# EAGLE board squall-blees-board (EAGLE 7.2.0)
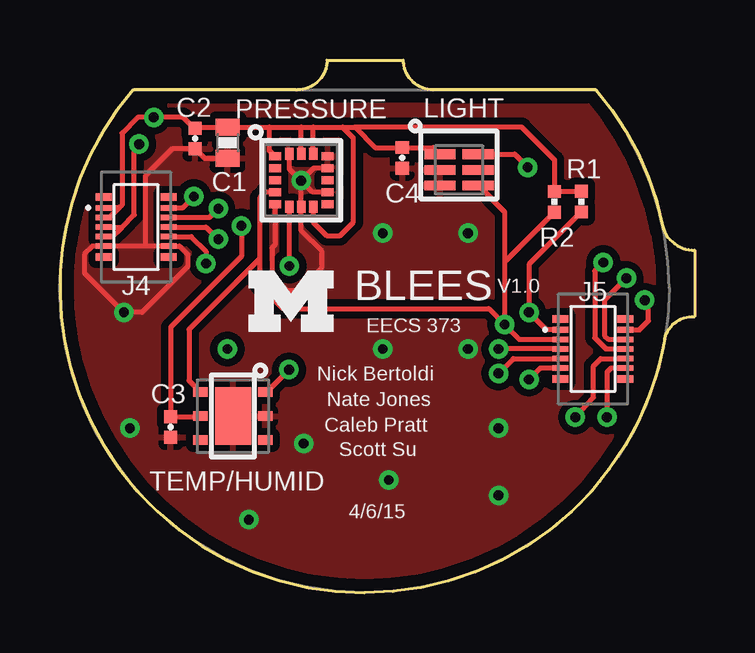
[diagram p0: board, top side]
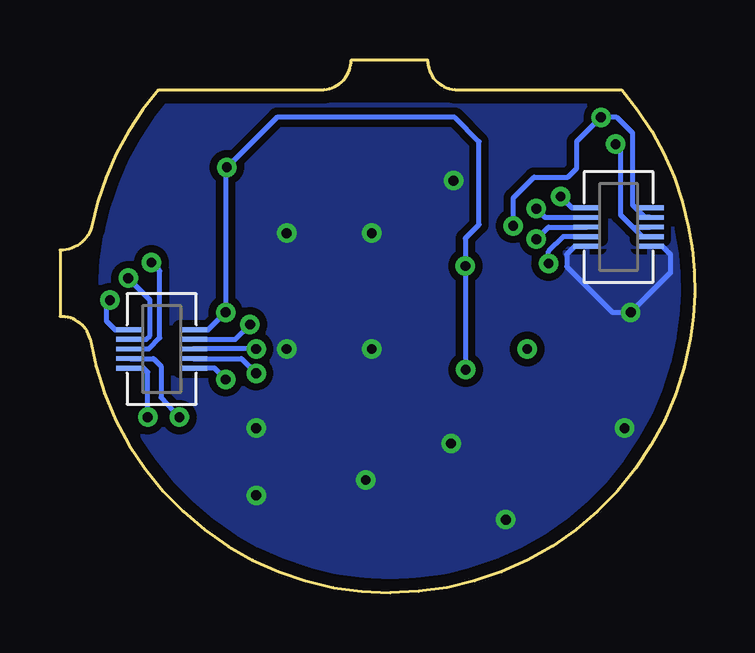
[diagram p1: board, bottom side, seen from below]

Size 26.46 x 22.2 mm. Coordinates in mm from the lower left corner, seen from the top.
Outline: 9.89,20.95 arc90 11.13,22.2 14.32,22.2 arc90 15.57,20.95 22.35,20.95 arc-30 25.14,15.25 arc75 26.46,14.28 26.46,11.51 arc80 25.21,10.58 arc-80 12.7,0 arc-80 0.18,10.58 arc-21 0.26,15.25 arc-30 3.04,20.95
Outline: 9.85,20.95 3.07,20.95
Copper layers (1*16): Top 0.0178mm / dielectric 59mil / Bottom 0.0178mm
Design rules "sunstone-2lyr_v1.0.0.3 *": minimum track width 6mil, minimum drill 14mil, track to track 5mil, track to pad 5mil, pad to pad 5mil, via to via 5mil, smd to smd 5mil, copper to edge 20mil, drill to drill 16mil, minimum pad ring 8mil, minimum via ring 8mil, stop-mask expansion 3mil, vias tented up to drill 0mil, thermal gap 10mil
tRestrict: 3 lines
bRestrict: 2 lines

## Footprints (pad centres in the part's own frame; a part is rotated, then mirrored left to right if it is on the bottom)
0603_CAP = smd 0.7 x 1: 1 -0.65,0; 2 0.65,0
0402_CAP = smd 0.536 x 0.546: 1 -0.433,0; 2 0.433,0
SQUALL_HEADER = smd 1.14 x 0.2 bottom: A1 -10.845,3.34; A2 -8.205,3.34; A3 -10.845,2.94; A4 -8.205,2.94; A5 -10.845,2.54; A6 -8.205,2.54; A7 -10.845,2.14; A8 -8.205,2.14; A9 -10.845,1.74; A10 -8.205,1.74; B1 8.205,-1.74; B2 10.845,-1.74; B3 8.205,-2.14; B4 10.845,-2.14; B5 8.205,-2.54; B6 10.845,-2.54; B7 8.205,-2.94; B8 10.845,-2.94; B9 8.205,-3.34; B10 10.845,-3.34
2X5/SMD/0.4MM = smd 0.66 x 0.23: 1 -1.355,0.8; 2 1.355,0.8; 3 -1.355,0.4; 4 1.355,0.4; 5 -1.355,0; 6 1.355,0; 7 -1.355,-0.4; 8 1.355,-0.4; 9 -1.355,-0.8; 10 1.355,-0.8 | smd 0.66 x 0.3: A -1.355,1.25; B 1.355,1.25; C -1.355,-1.25; D 1.355,-1.25
DFN2 = smd 1.3 x 0.4: 1 -0.8,0.65; 2 -0.8,0; 3 -0.8,-0.65; 4 0.8,-0.65; 5 0.8,0; 6 0.8,0.65
HCLGA-16L = smd 0.5 x 0.35: 1 -1.1,1; 2 -1.1,0.5; 3 -1.1,0; 4 -1.1,-0.5; 5 -1.1,-1; 9 1.1,-1; 10 1.1,-0.5; 11 1.1,0; 12 1.1,0.5; 13 1.1,1 | smd 0.35 x 0.5: 6 -0.5,-1.1; 7 0,-1.1; 8 0.5,-1.1; 14 0.5,1.1; 15 0,1.1; 16 -0.5,1.1
0402_RES = smd 0.536 x 0.546: 1 -0.433,0; 2 0.433,0
DFN = smd 0.6 x 0.4: 1 -1.35,-1; 2 -1.35,0; 3 -1.35,1; 4 1.35,1; 5 1.35,0; 6 1.35,-1 | smd 1.5 x 2.4: PAD 0,0

## Placement (x,y rotation side)
C1  10uF  [0603_CAP]  6.99,18.75 270 top
C2  100nF  [0402_CAP]  5.64,18.93 270 top
C3  100nF  [0402_CAP]  4.62,6.91 270 top
C4  100nF  [0402_CAP]  14.27,18.12 270 top
J1  SQUALL_HEADER  [SQUALL_HEADER]  12.7,12.7 0 top
J4  HIROSE-DF40C-10DP-0.4V  [2X5/SMD/0.4MM]  3.17,15.24 0 top
J5  HIROSE-DF40C-10DP-0.4V  [2X5/SMD/0.4MM]  22.22,10.16 0 top
LIGHT  TSL2560DFN  [DFN2]  16.64,17.62 0 top
PRESSURE  LPS331APQFN  [HCLGA-16L]  10.06,17.19 0 top
R1  2kΩ  [0402_RES]  21.74,16.3 90 top
R2  2kΩ  [0402_RES]  20.62,16.29 90 top
TEMP/HUMID  HTU21DDFN  [DFN]  7.21,7.37 180 top

## Library data of the parts
C1-C4 R1 R2 = passives
J1 = squall; DIGIKEY: H11617CT-ND
J4 J5 = headers; DIGIKEY: H11616CT-ND; MOUSER: 798-DF40C10DP0.4V51; NEWARK: 68X2585
LIGHT PRESSURE TEMP/HUMID = blees

## Nets
5V: J1.A5 J1.A7 J4.5 J4.7
A5: J1.B9 J5.9
A6: J1.B7 J5.7
A7: J1.B5 J5.5
GND: C1.2 C2.2 C3.2 C4.2 J1.A9 J1.A10 J4.9 J4.10 LIGHT.2 LIGHT.3 PRESSURE.5 PRESSURE.7 PRESSURE.10 PRESSURE.12 PRESSURE.13 PRESSURE.16 TEMP/HUMID.2 TEMP/HUMID.PAD
MISO: J1.B8 J5.8
MOSI: J1.B6 J5.6
P22: J1.A2 J4.2
P23: J1.A4 J4.4
P24: J1.A6 J4.6
P25: J1.A8 J4.8
SCL: J1.B3 J5.3 LIGHT.4 PRESSURE.4 R2.1 TEMP/HUMID.6
SCLK: J1.B10 J5.10
SDA: J1.B1 J5.1 LIGHT.6 PRESSURE.6 R1.1 TEMP/HUMID.1
SWDCLK: J1.B2 J5.2
SWDIO/!RESET: J1.B4 J5.4
VCC: C1.1 C2.1 C3.1 C4.1 J1.A1 J1.A3 J4.1 J4.3 LIGHT.1 PRESSURE.1 PRESSURE.8 PRESSURE.14 PRESSURE.15 R1.2 R2.2 TEMP/HUMID.5

## Tracks (layer width: path | path; a pad name or v marks a point on that pad's centre or on a via)
5V  (via drill 0.41)
  Top 0.203: J4.5 2.59,15.24 | 2.59,15.24 3.1,15.75 3.1,18.49 v3.3,18.69 | J4.7 2.19,14.84 2.59,15.24
  Bottom 0.203: v3.3,18.69 3.1,18.49 3.1,15.75 2.59,15.24 | 2.59,15.24 J1.A5 | J1.A7 2.19,14.84 2.59,15.24
A5  (via drill 0.41)
  Top 0.203: J5.9 20.02,9.36 v19.55,8.89
  Bottom 0.203: v19.55,8.89 20.02,9.36 J1.B9
A6  (via drill 0.41)
  Top 0.203: v18.28,9.14 18.9,9.76 J5.7
  Bottom 0.203: J1.B7 18.9,9.76 v18.28,9.14
A7  (via drill 0.41)
  Top 0.203: J5.5 v18.28,10.16
  Bottom 0.203: v18.28,10.16 J1.B5
GND  (via drill 0.41)
  Top 0.203: 3.55,14.44 J4.10 4.99,14.44 5.33,14.1 5.33,13.59 3.43,11.68 v2.66,11.68 1.01,13.34 1.01,14.1 1.36,14.44 J4.9 3.55,14.44 | 3.55,14.44 3.55,17.37 4.67,18.5 C2.2 6.03,18.1 C1.2 | PRESSURE.5 8.96,14.5 8.84,14.38 8.84,13.21 9.45,12.6 9.95,12.6 10.92,13.56 10.92,14.22 10.06,15.08 PRESSURE.7 v10.06,17.17 v10.05,17.17 | PRESSURE.12 10.58,17.69 v10.05,17.17 | PRESSURE.16 9.56,17.66 v10.05,17.17 | PRESSURE.10 10.53,16.69 v10.05,17.17
  Bottom 0.203: J1.A9 1.36,14.44 1.01,14.1 1.01,13.34 v2.66,11.68 3.43,11.68 5.33,13.59 5.33,14.1 4.99,14.44 J1.A10
  other vias: 13.46,14.99 17.01,14.99 13.46,10.16 17.01,10.16 18.28,6.86 10.16,6.22 13.71,4.7 18.28,4.06 7.87,3.05 2.92,6.86
  pour Top (isolate 0.305): 25.4,12.7 arc-180 0,12.7 arc-41 3.04,20.95 22.35,20.95 arc-41
  pour Bottom (isolate 0.305): 25.4,12.7 arc-180 0,12.7 arc-41 3.04,20.95 22.35,20.95 arc-41
MISO  (via drill 0.41)
  Top 0.203: v21.48,7.32 22.25,8.13 22.25,9.45 22.55,9.75 J5.8
  Bottom 0.203: J1.B8 22.56,9.76 22.25,9.45 22.25,8.13 v21.48,7.32
MOSI  (via drill 0.41)
  Top 0.203: v22.65,13.77 22.3,13.41 22.3,10.62 22.75,10.16 J5.6
  Bottom 0.203: J1.B6 22.75,10.16 22.3,10.62 22.3,13.41 v22.65,13.77
N$5  (via drill 0.41)
  other vias: 6.98,10.16
P22  (via drill 0.41)
  Top 0.203: J4.2 5.11,16.04 v5.58,16.51
  Bottom 0.203: v5.58,16.51 5.11,16.04 J1.A2
P23  (via drill 0.41)
  Top 0.203: J4.4 6.24,15.64 v6.6,16
  Bottom 0.203: v6.6,16 6.24,15.64 J1.A4
P24  (via drill 0.41)
  Top 0.203: J4.6 6.09,15.24 v6.6,14.73
  Bottom 0.203: v6.6,14.73 6.09,15.24 J1.A6
P25  (via drill 0.41)
  Top 0.203: J4.8 5.48,14.84 6.09,14.22 v6.09,13.72
  Bottom 0.203: J1.A8 5.48,14.84 6.09,14.22 v6.09,13.72
SCL  (via drill 0.41)
  Top 0.203: v18.54,11.18 19.15,10.56 J5.3 | LIGHT.4 18.54,15.87 18.54,13.78 | v18.54,11.18 18.54,13.56 18.54,13.78 | 8.33,13.92 8.33,16.46 8.56,16.69 PRESSURE.4 | 8.33,13.92 5.38,10.97 5.38,8.85 TEMP/HUMID.6 | 8.33,13.92 8.33,12.8 9.29,11.84 17.88,11.84 v18.54,11.18 | R2.1 18.54,13.78
  Bottom 0.203: J1.B3 19.15,10.56 v18.54,11.18
SCLK  (via drill 0.41)
  Top 0.203: J5.10 22.97,9.36 22.81,9.2 v22.81,7.32
  Bottom 0.203: v22.81,7.32 22.81,9.2 22.97,9.36 J1.B10
SDA  (via drill 0.41)
  Top 0.203: J5.1 20.28,10.96 v19.55,11.68 19.55,13.68 R1.1 | v19.5,17.73 18.96,18.27 LIGHT.6 17.52,18.19 | v9.55,9.3 8.62,8.37 TEMP/HUMID.1 | PRESSURE.6 v9.56,13.61
  Bottom 0.203: J1.B1 20.28,10.96 v19.55,11.68 19.55,17.68 v19.5,17.73 17.42,19.81 10,19.81 8.99,18.8 8.99,15.34 9.56,14.77 v9.56,13.61 9.56,13.51 9.56,9.31 v9.55,9.3
SWDCLK  (via drill 0.41)
  Top 0.203: J5.2 24.16,10.96 24.53,11.33 24.53,12.04 v24.38,12.19
  Bottom 0.203: v24.38,12.19 24.53,12.04 24.53,11.33 24.16,10.96 J1.B2
SWDIO/!RESET  (via drill 0.41)
  Top 0.203: v23.62,13.11 22.7,12.19 22.7,10.72 22.86,10.57 J5.4
  Bottom 0.203: J1.B4 22.86,10.56 22.7,10.72 22.7,12.19 v23.62,13.11
VCC  (via drill 0.41)
  Top 0.203: 8.73,19.4 C1.1 5.67,19.4 C2.1 5.58,19.36 5.13,19.81 v3.91,19.81 3.25,19.81 2.59,19.15 2.59,16.15 2.47,16.04 | 8.73,19.4 10.06,19.4 | 10.06,19.4 10.56,19.4 | 10.56,19.4 11.78,19.4 | 11.78,19.4 12.3,19.4 | 12.3,19.4 13.14,18.55 C4.1 15.56,18.55 LIGHT.1 | PRESSURE.1 8.73,18.42 8.73,19.4 | PRESSURE.15 10.06,19.4 | PRESSURE.14 10.56,19.4 | 2.47,16.04 J4.1 | J4.3 2.07,15.64 2.47,16.04 | 12.3,19.4 19.26,19.4 20.62,18.04 R2.2 20.63,16.73 R1.2 | PRESSURE.8 10.56,15.45 11.12,14.88 11.68,14.88 12.24,15.44 12.24,18.94 11.78,19.4 | TEMP/HUMID.5 5.84,7.34 C3.1 4.62,11.07 7.57,14.02 v7.57,15.29
  Bottom 0.203: J1.A1 2.47,16.04 | 2.47,16.04 2.59,16.15 2.59,19.15 3.25,19.81 v3.91,19.81 4.92,18.8 4.92,17.68 5.28,17.32 6.7,17.32 7.57,16.46 v7.57,15.29 | J1.A3 2.07,15.64 2.47,16.04

## Text on the board
tPlace: BLEES | V1.0 | EECS 373 | Nick Bertoldi | Nate Jones | Caleb Pratt | Scott Su | 4/6/15